# Altium PCB Stepdown 5V 1A.PcbDoc
Units mm, origin at the board's own origin, x right, y up, seen from the top; angles counter-clockwise.
Board outline 8.6 x 11.6 mm, 2 copper layers (Top Layer, Bottom Layer); 6 components, 5 nets, 30 pads, 0 vias.
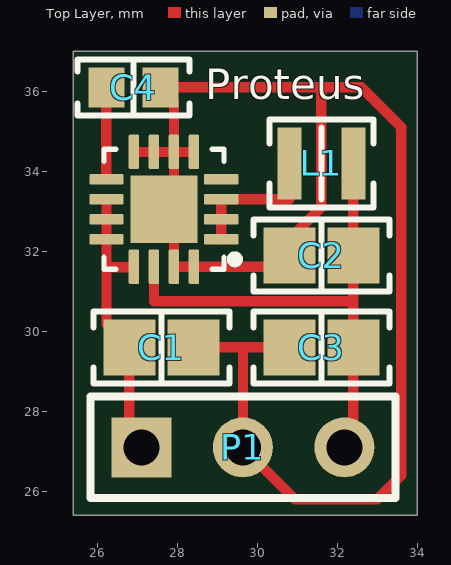
[diagram p0: Top Layer view]
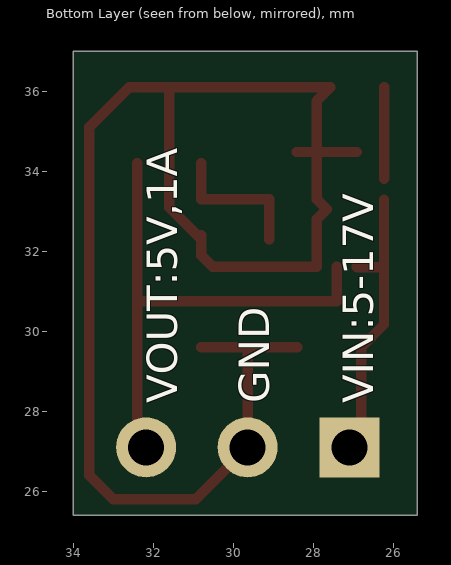
[diagram p1: Bottom Layer view, seen from below]
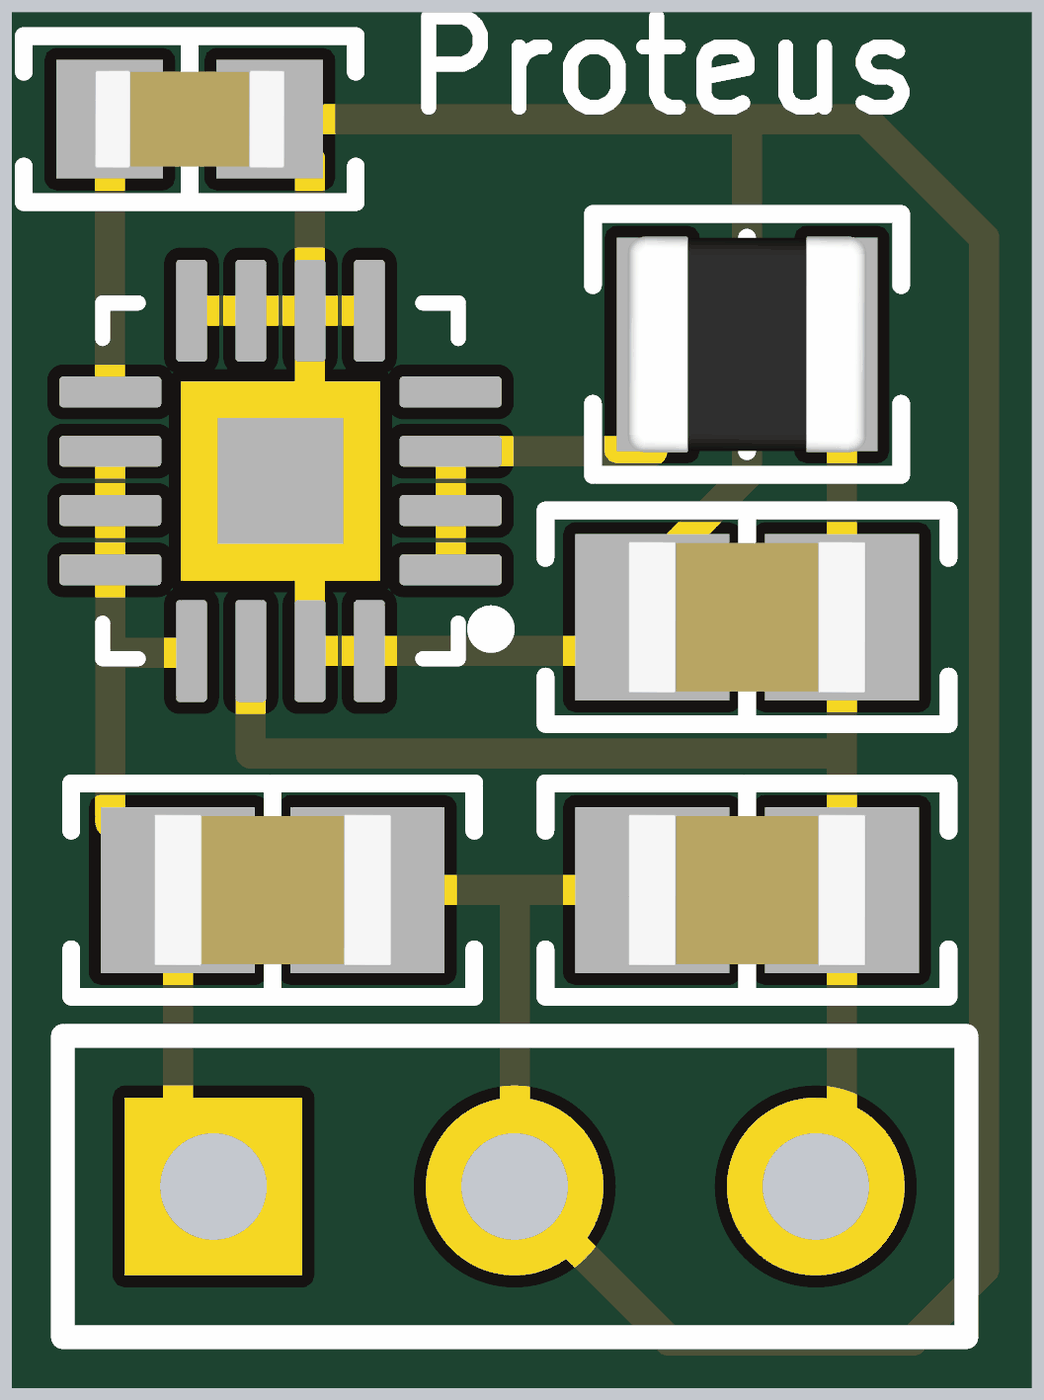
[diagram p2: 3D render of the assembled board from above, using the file's embedded part models]

## Layer stack, top to bottom
Top Solder: solder mask 0.0102, Solder Resist, Dk 3.5
Top Layer: signal copper 0.0356
Dielectric 1: dielectric 0.32, FR-4, Dk 4.8
Bottom Layer: signal copper 0.0356
Bottom Solder: solder mask 0.0102, Solder Resist, Dk 3.5

## Board outline
25.4,25.4 34,25.4 34,37 25.4,37

## Design rules (kind name [scope] priority, off if disabled: settings)
Clearance [All] p1: gap=0.254 ignorepadtopadclearanceinfootprint=TRUE except(0: Arc-Hole Track-Hole SMDPad-Hole THPad-Hole Via-Hole Fill-Hole Poly-Hole Region-Hole Text-Hole)
PolygonConnect [All] p1: connectstyle=Relief reliefconductorwidth=0.254 reliefentries=4 polygonreliefangle="90 Angle" airgapwidth=0.254
RoutingVias [All] p1: holewidth=0.711 width=1.27 viastyle="Through Hole" minholewidth=0.711 minwidth=1.27 maxholewidth=0.711 maxwidth=1.27
SolderMaskExpansion [All] p1: expansion=0.102
Width [All] p1: maxlimit=0.254 minlimit=0.254 preferedwidth=0.254
30 further rules are at their usual default settings.

## Components (designator, comment, footprint, x,y, rotation, side; value= is the part's Value field where it differs from the comment)
C1 "10µF" "CAP 0805_2012" 27.6,29.6 r180 top
C2 "10µF" "CAP 0805_2012" 31.6,31.9 r0 top
C3 "10µF" "CAP 0805_2012" 31.6,29.6 r0 top
C4 "3300pF" "CAP 0603_1608" 26.9,36.1 r180 top
L1 "2.2µH" "IND 0806_2016" 31.6,34.2 r0 top
P1 "Header 3" HDR1X3 27.1,27.1 r0 top

## Footprints (in the part's own frame and the unit in brackets; to place one, negate y for a bottom-side part, rotate by r counter-clockwise, add the part's x,y. Pads: shape width x height; smd on the part's side, far side on the other; paste and mask are expansions set on the pad)
"CAP 0603_1608" [mm] "Chip Capacitor, 2-Leads, Body 1.60x0.80mm, IPC Medium Density"
  rect 0.9x1 smd: 1(-0.675,0) 2(0.675,0)
  silkscreen extent -1.4,-0.7 1.4,0.7, body extent -0.8,-0.41 0.8,0.41, height 0.82
"CAP 0805_2012" [mm] "Chip Capacitor, 2-Leads, Body 2.00x1.20mm, IPC Medium Density"
  rect 1.3x1.4 smd: 1(-0.8,0) 2(0.8,0)
  silkscreen extent -1.7,-0.9 1.7,0.9, body extent -1,-0.64 1,0.64, height 1.26
HDR1X3 [mm] "Connector; Header; 3 Position"
  rect 1.5x1.5 hole 0.9: 1(0,0)
  round 1.5 hole 0.9: 2(2.54,0) 3(5.08,0)
  silkscreen extent -1.27,-1.27 6.35,1.27
"IND 0806_2016" [mm] "Chip Capacitor, 2-Leads, Body 2.00x1.20mm, IPC Medium Density"
  rect 0.6x1.8 smd: 1(-0.8,0) 2(0.8,0)
  silkscreen extent -1.3,-1.1 1.3,1.1, body extent -1.01,-0.91 1.01,0.91, height 1.81

## Part data
C1 C2 C3: library part C2012X5R1E106K085AC, "CAP CER 10UF 25V X5R 0805", Device Package="0805 (2012 Metric)", Manufacturer="TDK Corporation", Operating Temperature="-55°C ~ 85°C", Supplier Part Number 1=445-14387-1-ND, Temperature Coefficient=X5R, Tolerance=±10%, Voltage - Rated=25V, Applications="General Purpose", Capacitance=10µF, ComponentLink1Description=Datasheet, ComponentLink1URL=https://product.tdk.com/info/en/catalog/datasheets/mlcc_commercial_general_en.pdf?ref_disty=digikey, ComponentLink2Description="DigiKey Link", ComponentLink2URL=http://digikey.com/product-detail/en/tdk-corporation/C2012X5R1E106K085AC/445-14387-1-ND/3956053, Features="Low ESL", LastUpdated="1/21/2020 12:02:45 AM", Lifecycle Status=Active, Minimum Order=1, Mounting Type="Surface Mount, MLCC", Package / Case="0805 (2012 Metric)", Packaging=TapeAndReel, PartId=15274, Part Number=C2012X5R1E106K085AC, Part Status=Active, Price=0.15, Series=C, Size / Dimension="0.079\" L x 0.049\" W (2.00mm x 1.25mm)", Supplier 1=DigiKey, Thickness (Max)="0.039\" (1.00mm)"
C4: library part 06031C332K4T2A, "CAP CER 3300PF 100V X7R 0603", Device Package="0603 (1608 Metric)", Manufacturer="AVX Corporation", Operating Temperature="-55°C ~ 125°C", Ratings=AEC-Q200, Supplier Part Number 1=478-9863-1-ND, Temperature Coefficient=X7R, Tolerance=±10%, Voltage - Rated=100V, Applications=Automotive, Capacitance=3300pF, ComponentLink1Description=Datasheet, ComponentLink1URL=http://datasheets.avx.com/AutoMLCC.pdf, ComponentLink2Description="DigiKey Link", ComponentLink2URL=http://digikey.com/product-detail/en/avx-corporation/06031C332K4T2A/478-9863-1-ND/6002696, LastUpdated="9/2/2020 1:03:27 AM", Lifecycle Status=Active, Minimum Order=1, Mounting Type="Surface Mount, MLCC", Package / Case="0603 (1608 Metric)", Packaging=TapeAndReel, PartId=7242, Part Number=06031C332K4T2A, Part Status=Active, Price=0.02, Series=-, Size / Dimension="0.063\" L x 0.032\" W (1.60mm x 0.81mm)", Supplier 1=DigiKey, Thickness (Max)="0.035\" (0.90mm)"
L1: library part CIGW201610GH2R2MLE, "FIXED IND 2.2UH 1.8A 117MOHM", Current - Saturation=2.8A, Current Rating (Amps)=1.8A, DC Resistance (DCR)="117mOhm Max", Device Package="0806 (2016 Metric)", Inductance Frequency - Test=1MHz, Manufacturer="Samsung Electro-Mechanics", Operating Temperature="-40°C ~ 125°C", Supplier Part Number 1=1276-6905-1-ND, Tolerance=±20%, ComponentLink1Description=Datasheet, ComponentLink1URL=http://www.samsungsem.com/kr/support/product-search/inductor/CIGW201610GH2R2MLE.jsp, ComponentLink2Description="DigiKey Link", ComponentLink2URL=http://digikey.com/product-detail/en/samsung-electro-mechanics/CIGW201610GH2R2MLE/1276-6905-1-ND/7041305, Height - Seated (Max)="0.039\" (1.00mm)", Inductance=2.2µH, LastUpdated="9/2/2020 1:24:35 AM", Lifecycle Status=Active, Material - Core="Metal Composite", Minimum Order=1, Mounting Type="Surface Mount", Package / Case="0806 (2016 Metric)", PartId=3764, Part Number=CIGW201610GH2R2MLE, Part Status=Active, Price=0, Series=CIGW, Shielding=Unshielded, Size / Dimension="0.079\" L x 0.063\" W (2.00mm x 1.60mm)", Supplier 1=DigiKey, Supplier Device Package="0806 (2016 Metric)", Type=Wirewound
P1: "Header, 3-Pin", LatestRevisionDate=17-Jul-2002, LatestRevisionNote="Re-released for DXP Platform.", Publisher="Altium Limited"

## Free pads (board coordinates)
  rrect25% 0.86x0.26 smd: 1(29.1,32.3) 2(29.1,32.8) 3(29.1,33.3) 4(29.1,33.8) 9(26.23,33.8) 10(26.23,33.3) 11(26.23,32.8) 12(26.23,32.3)
  rrect25% 0.26x0.86 smd: 5(28.415,34.485) 6(27.915,34.485) 7(27.415,34.485) 8(26.915,34.485) 13(26.915,31.615) 14(27.415,31.615) 15(27.915,31.615) 16(28.415,31.615)
  rect 1.68x1.68 smd paste-2: 17(27.665,33.05)

## Nets (pads, with @x,y where several pads share a name; then routed paths per layer and width w, separated by ;. In a path a pad name is that pad's centre, name@x,y a point inside that pad or via, vN(x,y) a via of type N, cw(c..) or ccw(c..) an arc to the next point about the centre after c; other vN are vias at no path point)
GND: C1.1 C2.1 C3.1 C4.1 P1.2 pad.5 pad.6 pad.7 pad.8 pad.15 pad.16 pad.17 | length 38.8
  Top Layer w0.254: pad.8 pad.7 pad.6 ; C1.1 29.64,29.6 ; pad.5 pad.6 ; C3.1 29.64,29.6 ; C2.1@30.8,32.4 C2.1@30.8,32.3 ; pad.6 27.915,33.3 pad.17 27.915,32.8 pad.15 pad.16 30.515,31.615 C2.1 C2.1@30.8,32.3 ; pad.6 27.915,35.76 C4.1 31.6,36.1 ; 29.64,29.6 P1.2 30.94,25.8 33,25.8 33.6,26.4 33.6,35.1 32.6,36.1 31.6,36.1 ; C2.1@30.8,32.3 31.6,33.1 31.6,36.1
NetC4_2: C4.2 pad.9 | length 2.3
  Top Layer w0.254: C4.2 26.225,33.816 pad.9@26.23,33.811
NetL1_1: L1.1 pad.1 pad.2 pad.3 | length 3.6
  Top Layer w0.254: pad.1 pad.2 pad.3 30.8,33.3 L1.1
VIN: C1.2 P1.1 pad.10 pad.11 pad.12 pad.13 | length 7.2
  Top Layer w0.254: pad.10@26.23,33.289 pad.11 pad.12 26.23,31.6 ; pad.13 26.9,31.6 26.23,31.6 ; P1.1 26.8,27.4 C1.2 26.23,30.17 26.23,31.6
VOUT: C2.2 C3.2 L1.2 P1.3 pad.14 | length 13
  Top Layer w0.254: pad.14 27.415,30.75 32.4,30.75 ; P1.3 32.4,27.32 C3.2 32.4,30.75 ; L1.2 C2.2 32.4,30.75

## Silkscreen, mask and mechanical layers (free items; w line width, h text height)
Top Overlay:
  circle w0.2: c29.44,31.8 r0.1
  lines w0.127: 26.165,31.85 26.165,31.55 26.465,31.55 ; 26.165,34.25 26.165,34.55 26.465,34.55 ; 28.865,31.55 29.165,31.55 29.165,31.85 ; 28.865,34.55 29.165,34.55 29.165,34.25
  text "Proteus" at 28.7,35.8 h0.76
Bottom Overlay:
  text "VIN:5-17V" at 26.5,28.2 h0.76 r270
  text "GND" at 29.1,28.2 h0.76 r270
  text "VOUT:5V,1A" at 31.4,28.2 h0.76 r270
Top Paste:
  region: 27.135,33.58 28.195,33.58 28.195,32.52 27.135,32.52
Mechanical 7:
  the board outline again, w0.127
Mechanical 13:
  circle w0.2: c29.44,31.8 r0.1
  lines w0.127: 26.165,31.55 29.165,31.55 29.165,34.55 26.165,34.55 26.165,31.55
Mechanical 15:
  lines w0.05: 25.55,30.935 29.78,30.935 29.78,35.165 25.55,35.165 25.55,30.935